# Altium PCB PCB1.PcbDoc
Units mm, origin at the board's own origin, x right, y up, seen from the top; angles counter-clockwise.
Board outline 100 x 50 mm, 4 copper layers (Top Layer, GROUND, POWER, Bottom Layer), stack 0.603 mm thick; 48 components, 31 nets, 156 pads, 137 vias.
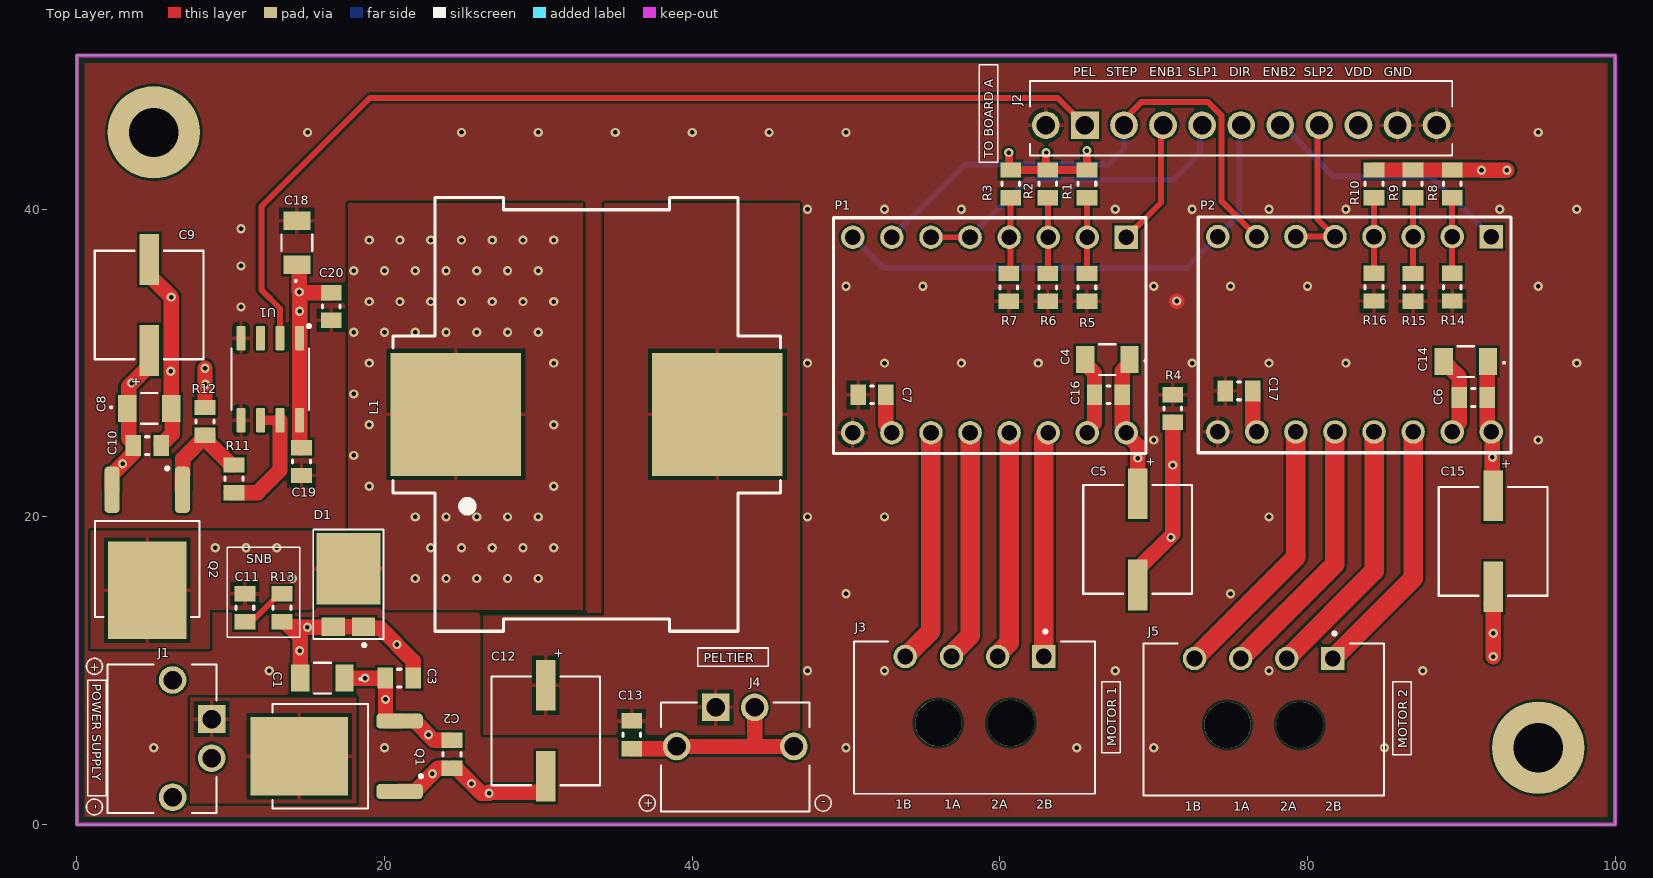
[diagram p0: Top Layer view]
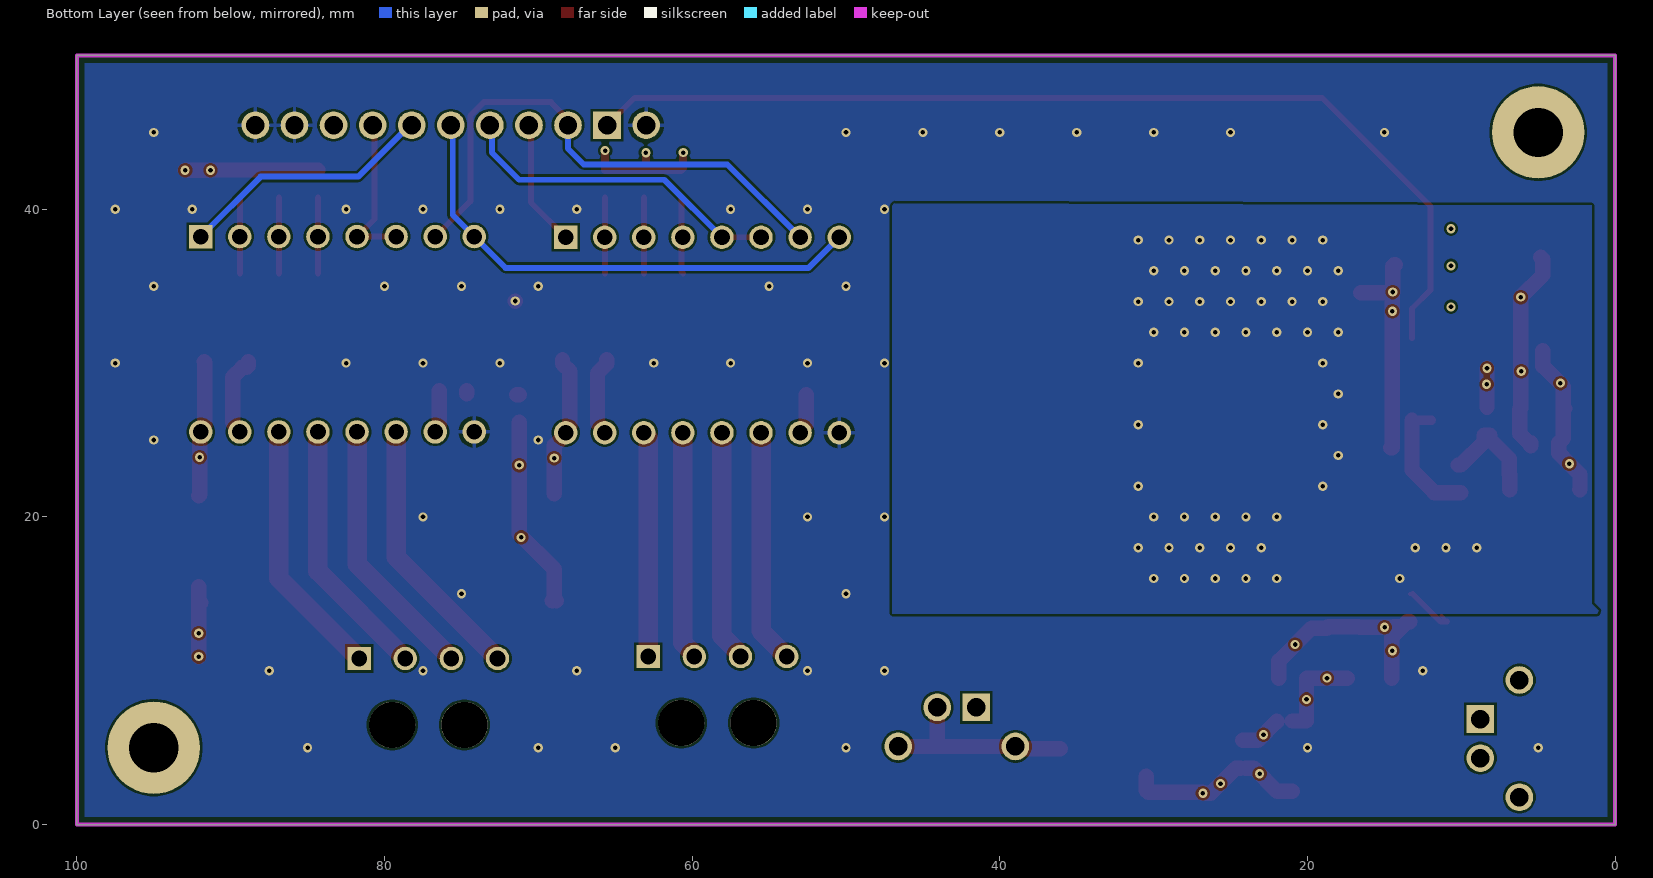
[diagram p1: Bottom Layer view, seen from below]
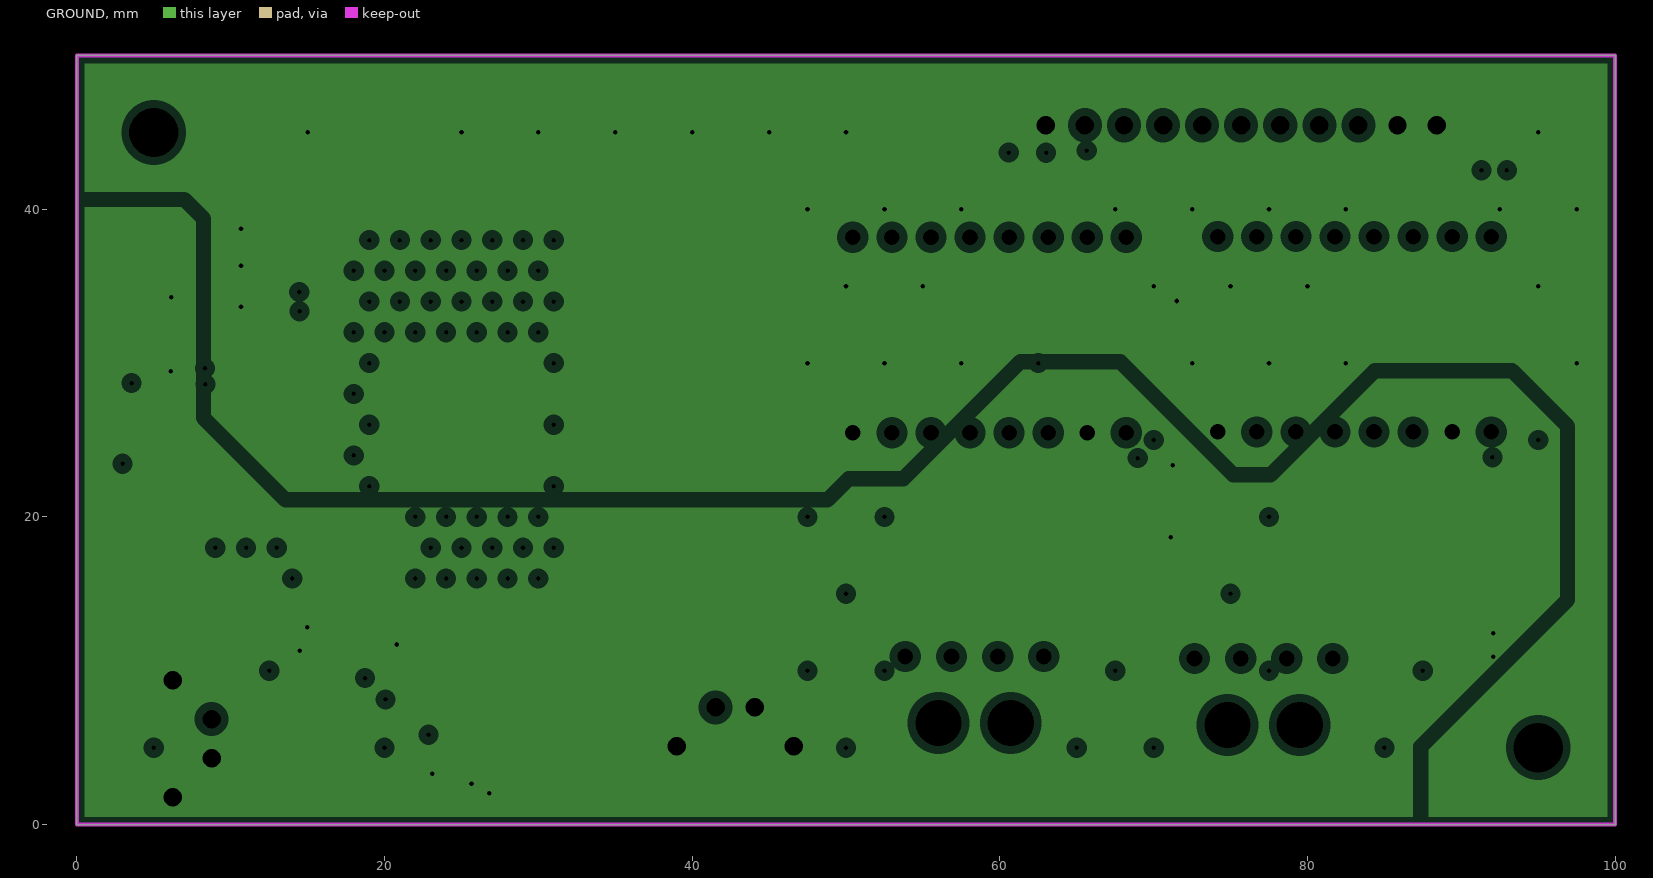
[diagram p2: GROUND, clearances drawn from the general rule]
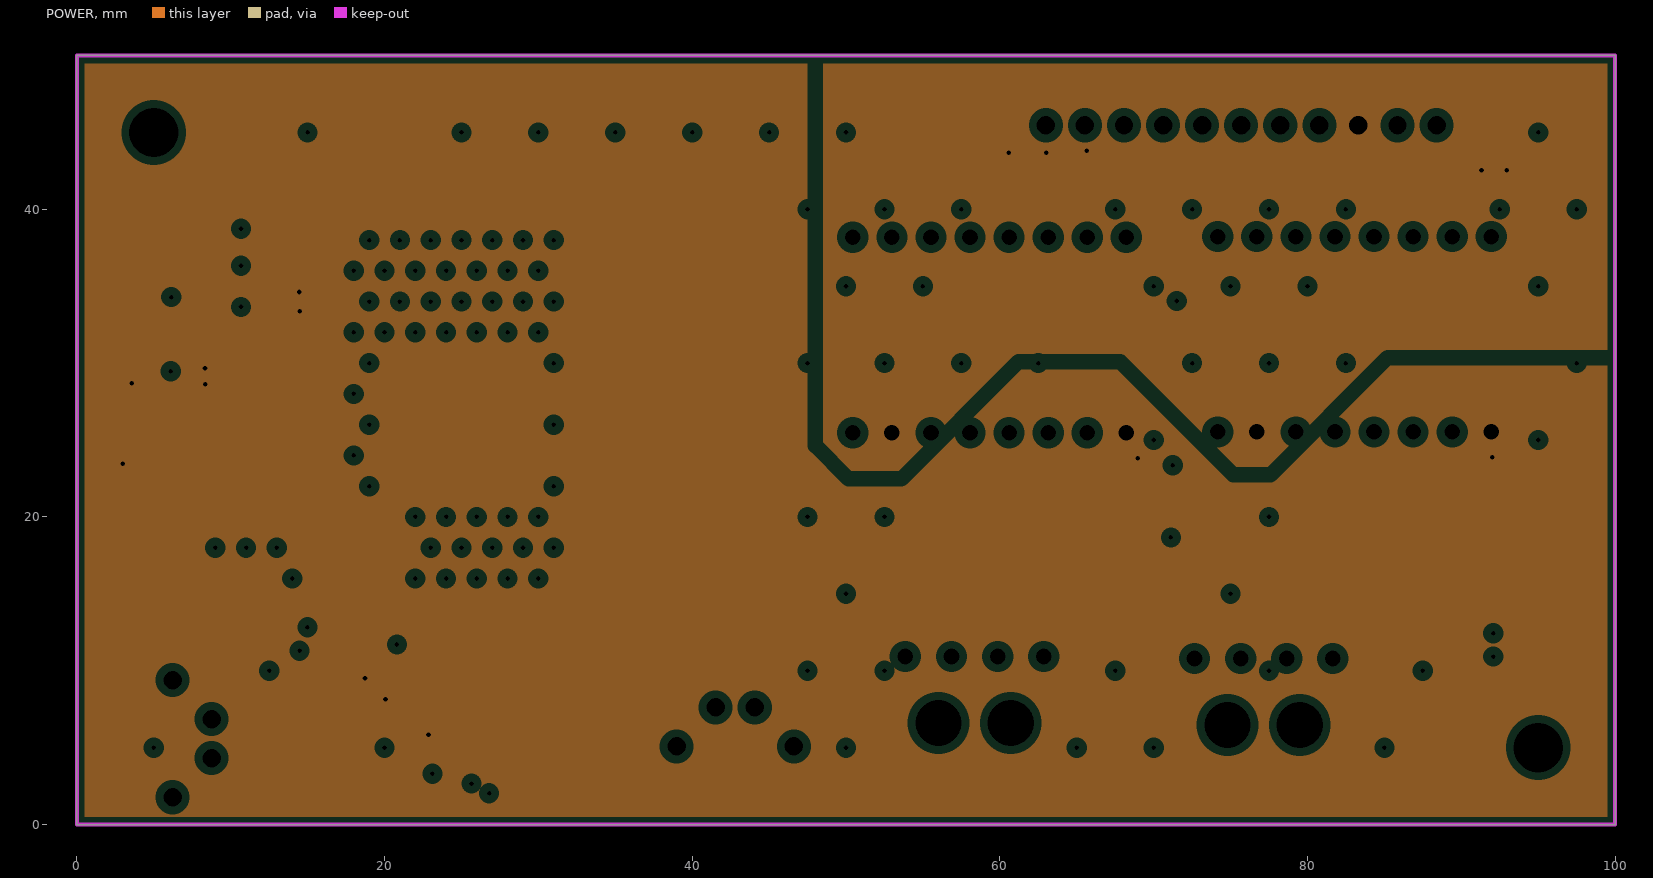
[diagram p3: POWER, clearances drawn from the general rule]

## Layer stack, top to bottom
Top Solder: solder mask 0.0102, Solder Resist, Dk 3.5
Top Layer: signal copper 0.0356
Dielectric 2: prepreg 0.0711, PP-006, Dk 4.1
GROUND: plane copper 0.035, net (Multiple Nets)
Dielectric 1: dielectric 0.32, FR-4, Dk 4.8
POWER: plane copper 0.035, net (Multiple Nets)
Dielectric 3: prepreg 0.0711, PP-006, Dk 4.1
Bottom Layer: signal copper 0.0356
Bottom Solder: solder mask 0.0102, Solder Resist, Dk 3.5

## Board outline
0,0 0,50 100,50 100,0

## Design rules (kind name [scope] priority, off if disabled: settings)
BoardOutlineClearance [All] p1: gap=0.5 ignorepadtopadclearanceinfootprint=FALSE
Clearance Clearance_Jumper [InComponent('SB*')] p1: gap=0.152 ignorepadtopadclearanceinfootprint=TRUE
Clearance Clearanse_Temp_Sensor [InComponent('U4')] p2: gap=0.152 ignorepadtopadclearanceinfootprint=TRUE
Clearance Clearance_bridges [All vs InComponent('SB4_MD1') OR InComponent('SB5_MD1') OR InComponent('SB6_MD1') OR InComponent('SB4_MD2') OR InComponent('SB5_MD2') OR InComponent('SB6_MD2')] p3: gap=0.152 ignorepadtopadclearanceinfootprint=TRUE
Clearance [All] p4: gap=0.152 ignorepadtopadclearanceinfootprint=TRUE
HoleSize [All] p1: absolutevalues=TRUE maxlimit=3.2 minlimit=0.025 maxpercent=80.000 minpercent=20.000
MinimumSolderMaskSliver MinimumSolderMaskSliver_1 [All] p1: minsoldermaskwidth=0.1
MinimumSolderMaskSliver [All] p2: minsoldermaskwidth=0.254
PlaneClearance [All] p1: clearance=0.508
PlaneConnect [All] p1: pad.planeconnectstyle=Relief pad.reliefexpansion=0.508 pad.reliefentries=4 pad.reliefconductorwidth=0.254 pad.reliefairgap=0.254 via.planeconnectstyle=Direct via.reliefexpansion=0.508 via.reliefentries=4 via.reliefconductorwidth=0.254 via.reliefairgap=0.254
PolygonConnect PolygonConnect_1 [InNet('NetD3_3') OR InNet('NetC34_2') OR InNet('NetQ1_1') OR InNet('VBB2') OR InNet('AGND') OR InNet('GND') OR InNet('VCC') OR InNet('VTCD') OR InNet('VDD') OR InNet('NetR5_1') OR InNet('NetC7_2')] p1 off: connectstyle=Direct reliefconductorwidth=0.254 reliefentries=4 polygonreliefangle="90 Angle" airgapwidth=0.254
PolygonConnect [All] p2: thpad.connectstyle=Relief thpad.reliefconductorwidth=0.254 thpad.reliefentries=4 thpad.polygonreliefangle="90 Angle" thpad.airgapwidth=0.254 smdpad.connectstyle=Relief smdpad.reliefconductorwidth=0.254 smdpad.reliefentries=4 smdpad.polygonreliefangle="90 Angle" smdpad.airgapwidth=0.254 via.connectstyle=Direct via.reliefconductorwidth=0.254 via.reliefentries=4 via.polygonreliefangle="90 Angle" via.airgapwidth=0.254
RoutingVias [All] p1: holewidth=0.3 width=0.6 viastyle="Through Hole" minholewidth=0.3 minwidth=0.5 maxholewidth=0.6 maxwidth=1
ShortCircuit ShortCircuit_bridges [All vs InComponent('SB*')] p1: allowed=TRUE
ShortCircuit [All] p2: allowed=FALSE
SilkToSilkClearance SilkToSilkClearance_1 [All] p1: silktosilkclearance=0.1
SilkToSilkClearance [All] p2: silktosilkclearance=0.254
SilkToSolderMaskClearance SilkToSolderMaskClearance_1 [IsPad] p1: minsilkscreentomaskgap=0.1 clearancetoexposedcopper=TRUE
SilkToSolderMaskClearance [IsPad] p2: minsilkscreentomaskgap=0.254 clearancetoexposedcopper=TRUE
SolderMaskExpansion SolderMaskExpansion_1 [All] p1: expansion=0.05 istentingtop=FALSE
SolderMaskExpansion [All] p2: expansion=0.1 istentingtop=FALSE
SupplyNets "Schematic Supply Nets_11" [InNet('VDD2')] p1: voltage=0.000
SupplyNets "Schematic Supply Nets_10" [InNet('GND2')] p2: voltage=0.000
SupplyNets "Schematic Supply Nets_9" [InNet('VBB2')] p3: voltage=0.000
SupplyNets "Schematic Supply Nets_3" [InNet('PGND2')] p4: voltage=0.000
Width Width_Power [InNetClass('Power_Class')] p1: maxlimit=0.6 minlimit=0.3 preferedwidth=0.6
Width Width_bridges [InComponent('SB4_MD1') OR InComponent('SB5_MD1') OR InComponent('SB6_MD1') OR InComponent('SB4_MD2') OR InComponent('SB5_MD2') OR InComponent('SB6_MD2')] p2: maxlimit=0.254 minlimit=0.152 preferedwidth=0.2
Width Width_motores [InNet('VBB')] p3: maxlimit=2 minlimit=0.5 preferedwidth=1
Width [All] p4: maxlimit=1.27 minlimit=0.2 preferedwidth=0.25
23 further rules are at their usual default settings.

## Components (designator, comment, footprint, x,y, rotation, side; value= is the part's Value field where it differs from the comment)
C1 "4.7u" CAP_1206 15.964,9.525 r180 top
C2 "100n" RES_0805 24.384,4.572 r270 top
C3 "100p" RES_0805 20.955,9.525 r0 top
C4 "4.7u" CAP_1206 66.992,30.226 r180 top
C5 "100u" CAP_EEFK_D8_PAN-M 68.961,18.542 r270 top
C6 "100n" RES_0805 90.78,27.762 r180 top
C7 "100n" RES_0805 51.689,27.94 r180 top
C8 "10u" CAP_1206 4.699,27.051 r0 top
C9 "100u" CAP_EEFK_D8_PAN-M 4.699,33.782 r90 top
C10 "100n" RES_0805 4.572,24.638 r0 top
C11 "SNB" RES_0805 10.922,14.097 r270 top
C12 "100u" CAP_EEFK_D8_PAN-M 30.48,6.096 r270 top
C13 "100n" RES_0805 36.068,5.842 r270 top
C14 "4.7u" CAP_1206 90.297,30.099 r180 top
C15 "100u" CAP_EEFK_D8_PAN-M 92.075,18.415 r270 top
C16 "100n" RES_0805 67.056,27.94 r180 top
C17 "100n" RES_0805 75.554,28.194 r180 top
C18 "4.7u" CAP_1206 14.3,37.821 r90 top
C19 "100n" RES_0805 14.605,23.597 r270 top
C20 "100n" RES_0805 16.535,33.68 r270 top
D1 "DIODE_FSV15150V" FSV15150V_TO-277 17.653,15.621 r270 top
J1 "Phoenix2H_1706207" PHOENIX_1706207 1.983,10.418 r270 top
J2 "Phoenix9V_1821465" PHOENIX_1821465 61.972,43.496 r0 top
J3 "Molex_4P" MOLEX_436500402 62.856,10.924 r0 top
J4 "Phoenix2H_1706207" PHOENIX_1706207 37.969,0.84 r0 top
J5 "Molex_4P" MOLEX_436500402 81.653,10.797 r0 top
L1 "74437529203220" WE-HCF_2920_ROUND 33.138,26.67 r90 top
P1 "2x8_PINES" PINES8x2-sep 59.69,31.75 r180 top locked
P2 "2x8_PINES" PINES8x2-sep 83.414,31.797 r180 top locked
Q1 "AOD417" DPAK228P994X240_3N 16.891,4.445 r90 top
Q2 "AOD417" DPAK228P994X240_3N 4.572,17.68 r180 top
R1 "0" RES_0805 65.659,41.656 r90 top
R2 "0" RES_0805 63.119,41.656 r90 top
R3 "0" RES_0805 60.706,41.656 r90 top
R4 "0" RES_0805 71.247,27.051 r270 top
R5 "10k" RES_0805 65.659,34.925 r90 top
R6 "10k" RES_0805 63.119,34.925 r90 top
R7 "10k" RES_0805 60.579,34.925 r90 top
R8 "0" RES_0805 89.408,41.656 r90 top
R9 "0" RES_0805 86.868,41.656 r90 top
R10 "0" RES_0805 84.328,41.656 r90 top
R11 "10" RES_0805 10.211,22.479 r90 top
R12 "100k" RES_0805 8.331,26.213 r270 top
R13 "SNB" RES_0805 13.335,14.097 r90 top
R14 "10k" RES_0805 89.408,34.936 r90 top
R15 "10k" RES_0805 86.868,34.925 r90 top
R16 "10k" RES_0805 84.328,34.936 r90 top
U1 "TC4420COA" SOIC127P599X175-8N 12.573,28.953 r270 top

## Footprints (in the part's own frame and the unit in brackets; to place one, negate y for a bottom-side part, rotate by r counter-clockwise, add the part's x,y. Pads: shape width x height; smd on the part's side, far side on the other; paste and mask are expansions set on the pad)
CAP_1206 [mil]
  rect 47x69 smd paste+0 mask+0: 1(-56.5,0) 2(56.5,0)
  silkscreen extent -100,-40 21,40, body extent -66,-34 66,34, height 71
CAP_EEFK_D8_PAN-M [mil]
  rect 130x50 smd paste+0 mask+0: 1(-116.5,0) 2(116.5,0)
  silkscreen extent -139,-139 139,139, body extent -154,-134 154,134, height 317
DPAK228P994X240_3N [mm]
  rrect50% 0.97x3.02 smd: 1(-2.286,-4.09) 3(2.286,-4.09)
  rect 5.09x6.32 smd paste-4: 4(0,2.44)
  silkscreen extent -3.4,-5.58 3.4,4.18, body extent -3.3,-4.97 3.3,5.06, height 2.41
FSV15150V_TO-277 [mm]
  rect 1.2x1.5 smd: 1(2.75,0.985) 2(2.75,-0.985)
  rect 4.65x4.15 smd: 3(-1,0)
  silkscreen extent -3.56,-2.29 4.05,2.29, body extent -3.25,-2.22 3.25,2.22, height 1.2
MOLEX_436500402 [mm]
  rect 1.52x1.52 / inner round 1.52 / far side rect 1.52x1.52 hole 1.02 mask+0.076: 1(0,0)
  round 1.52 hole 1.02 mask+0.076: 2(-3,0) 3(-6,0) 4(-9,0)
  round 3 hole 3 unplated mask+0.076: ""(-6.85,-4.32) ""(-2.15,-4.32)
  silkscreen extent -12.32,-8.92 3.32,1.72, body extent -12.37,-8.9 3.27,1, height 5.57
PHOENIX_1706207 [mm]
  rect 1.8x1.8 / inner round 1.8 / far side rect 1.8x1.8 hole 1.2: 1(3.56,6.78)
  round 1.8 hole 1.2: 2(6.1,6.78) MH1(1.02,4.24) MH2(8.64,4.24)
  silkscreen extent 0,0 9.66,7.1, body extent 0.04,0 9.71,7.38, height 4.85
PHOENIX_1821465 [mm]
  rect 1.8x1.8 / inner round 1.8 / far side rect 1.8x1.8 hole 1.2: 1(3.56,1.97)
  round 1.8 hole 1.2: 2(6.1,1.97) 3(8.64,1.97) 4(11.18,1.97) 5(13.72,1.97) 6(16.26,1.97) 7(18.8,1.97) 8(21.34,1.97) 9(23.88,1.97) MH1(1.02,1.97) MH2(26.42,1.97)
  silkscreen extent 0,0 27.44,4.85, body extent 0.05,-0.03 27.5,4.82, height 7.1
PINES8x2-sep [mil]
  rect 60x60 / inner round 60 / far side rect 60x60 hole 40: 1(-335.98,-253.15)
  round 60 hole 40: 2(-235.98,-253.15) 3(-135.98,-253.15) 4(-35.98,-253.15) 5(64.02,-253.15) 6(164.02,-253.15) 7(264.02,-253.15) 8(364.02,-253.15) 9(364.02,246.85) 10(264.02,246.85) 11(164.02,246.85) 12(64.02,246.85) 13(-35.98,246.85) 14(-135.98,246.85) 15(-235.98,246.85) 16(-335.98,246.85)
  silkscreen extent -386,-303 414,300, body extent -400,-301 426,300, height 571
RES_0805 [mm] "Chip Resistor, 2-Leads, Body 2.00x1.25mm, IPC Medium Density"
  rect 1x1.35 smd: 1(-0.9,0) 2(0.9,0)
  silkscreen extent -0.1,-0.58 0.1,0.58, body extent -1.05,-0.67 1.05,0.67, height 0.6
SOIC127P599X175-8N [mm]
  rrect25% 1.58x0.6 smd: 1(-2.67,1.905) 2(-2.67,0.635) 3(-2.67,-0.635) 4(-2.67,-1.905) 5(2.67,-1.905) 6(2.67,-0.635) 7(2.67,0.635) 8(2.67,1.905)
  silkscreen extent -3.55,-2.52 1.99,2.6, body extent -3,-2.45 3,2.45, height 1.75
WE-HCF_2920_ROUND [mm]
  rect 8x8.5 smd paste+0 mask+0.102: 1(0,8.5) 2(0,-8.5)
  silkscreen extent -14.1,-12.6 14.1,12.6, body extent -13.62,-11.45 13.68,11.65, height 20

## Part data
C1 C4 C14 C18: library part CAP_1206, "Taiyo Yuden UMK316AB7475KL-T"
C2 C3 C6 C7 C10 C11 C13 C16 C17 C19 C20: library part CAP_0805, "0805 Capacitor without polarity"
C5 C9 C12 C15: library part CAP_RAD_POL, "Panasonic EEE-FK1V101XP"
C8: library part CAP_1206, "Samsung CL31A106KAHNNNE"
J1 J2 J4: Package=None, Availability=Unavailable, Price=None
  J1 J4: MP=1706207
  J2: MF="{'manufacturer': u'Phoenix Contact'}", MP=1821465
J3 J5: "Connector Header Through Hole, Right Angle 4 position 0.118 (3.00mm) (Molex 436500402)", Package=None, Check_prices=https://www.snapeda.com/parts/436500402/Molex/view-part/?ref=eda, MF=Molex, MP=436500402, SnapEDA_Link=https://www.snapeda.com/parts/436500402/Molex/view-part/?ref=snap
L1: library part 22uH_74437529203220, Package=None, Availability=Unavailable, MF="{'manufacturer': u'W\xfcrth Elektronik'}", MP=74437529203220, Price=None
Q1 Q2: "P-Channel 30V 25A _Ta_ 2.5W _Ta_, 50W _Tc_ Surface Mount TO-252, _D-Pak_", Package="TO-252 Alpha &amp; Omega Semiconductor", Availability=Unavailable, MF="Alpha &", MP=AOD417, Price=None, SnapEDA_Link=https://www.snapeda.com/parts/AOD417/Alpha%20%26%20Omega%20Semiconductor%20Inc./view-part/454934/?ref=snap
R1 R2 R3 R4 R5 R6 R7 R8 R9 R10 R11 R12 R13 R14 R15 R16: library part RES_0805, "Generic Capacitor"
U1: "Microchip TC4420COA,MOSFET Power Driver 6A,4.5 to 18V,Non-Inverting,8-Pin SOIC", Package="SOIC-8 Microchip", Check_prices=https://www.snapeda.com/parts/TC4420COA/Microchip/view-part/?ref=eda, MF="Microchip Technology", MP=TC4420COA, SnapEDA_Link=https://www.snapeda.com/parts/TC4420COA/Microchip/view-part/?ref=snap

## Free pads (board coordinates)
  round 6 hole 3.2 unplated mask+0.3: H(5,45) H(95,5)

## Via types
v1: diameter 0.6, hole 0.3, Top Layer to Bottom Layer, 137 vias

## Nets (pads, with @x,y where several pads share a name; then routed paths per layer and width w, separated by ;. In a path a pad name is that pad's centre, name@x,y a point inside that pad or via, vN(x,y) a via of type N, cw(c..) or ccw(c..) an arc to the next point about the centre after c; other vN are vias at no path point)
B_DIR: J2.5 P1.8 P2.8 | length 33.5
  Bottom Layer w0.384: P1.8 52.429,36.195 72.136,36.195 P2.8 75.565,39.624 J2.5@75.565,45.72
B_NENBL1: J2.3 P1.1 | length 8.5
  Top Layer w0.384: P1.1 70.485,40.441 J2.3@70.485,45.72
B_NENBL2: J2.6 P2.1 | length 16.9
  Bottom Layer w0.384: J2.6@78.105,45.72 81.702,42.123 88.052,42.123 P2.1
B_NSLP1: J2.4 P1.5 P1.6 | length 21.8
  Top Layer w0.384: P1.6 P1.5
  Bottom Layer w0.384: P1.5 61.808,41.924 71.261,41.924 73.025,43.688 J2.4@73.025,45.72
B_NSLP2: J2.7 P2.5 P2.6 | length 10.5
  Top Layer w0.384: P2.6 P2.5 80.645,39.37 J2.7@80.645,45.72
B_PELCTRL: J2.1 U1.2 | length 66.3
  Top Layer w0.384: U1.2 13.208,33.553 11.989,34.773 11.989,40.183 19.05,47.244 63.754,47.244 64.824,46.174 J2.1
B_STEP: J2.2 P1.7 P2.7 | length 35.5
  Top Layer w0.384: J2.2@68.326,45.72 67.945,45.72 69.187,46.962 73.539,46.962 74.422,46.079 74.422,40.513 P2.7
  Bottom Layer w0.384: P1.7 57.721,42.917 67.047,42.917 68.072,43.942 J2.2
GND2: C7.2 C17.2 C18.2 C19.2 C20.2 J2.9 J2.MH1 J2.MH2 P1.9 P2.9 R4.1 R5.1 R6.1 R7.1 R14.1 R15.1 R16.1 U1.4 U1.5 | length 0.6
  Top Layer w1: P1.9 P1.9@50.444,25.622 ; R4.1 R4.1@71.422,27.951 ; v1@71.49,34.025 v1(71.501,34.036) ; P2.9 P2.9@74.168,25.669 ; C17.2@74.654,28.019 C17.2
  other v1: 5,5 20,5 50,5 65,5 70,5 85,5 12.5,10 47.5,10 52.5,10 67.5,10 77.5,10 87.5,10 50,15 75,15 47.5,20 52.5,20 77.5,20 70,25 95,25 47.5,30 52.5,30 57.5,30 62.5,30 72.5,30 77.5,30 82.5,30 97.5,30 10.668,33.655 50,35 55,35 70,35 75,35 80,35 95,35 10.668,36.322 10.668,38.735 47.5,40 52.5,40 57.5,40 67.5,40 72.5,40 77.5,40 82.5,40 92.5,40 97.5,40 15,45 25,45 30,45 35,45 40,45 45,45 50,45 95,45
NetC11_1: C11.1 D1.3 L1.1 Q2.4
  other v1: 14,16 22,16 24,16 26,16 28,16 30,16 9,18 11,18 13,18 23,18 25,18 27,18 29,18 31,18 22,20 24,20 26,20 28,20 30,20 19,22 31,22 18,24 19,26 31,26 18,28 19,30 31,30 18,32 20,32 22,32 24,32 26,32 28,32 30,32 19,34 21,34 23,34 25,34 27,34 29,34 31,34 18,36 20,36 22,36 24,36 26,36 28,36 30,36 19,38 21,38 23,38 25,38 27,38 29,38 31,38
NetC11_2: C11.2 R13.2 | length 3.7
  Top Layer w0.25: C11.2 C11.2@11.297,13.572 ; R13.2@13.16,14.997 R13.2
  Top Layer w0.381: C11.2 11.36,13.197 R13.2@13.16,14.997
NetC12_1: C12.1 C13.1 J4.1 L1.2
NetJ1_1: J1.1 Q1.4
NetJ3_1: J3.1 P1.14 | length 14.7
  Top Layer w1.27: J3.1 62.856,25.123 63.144,25.411 P1.14
NetJ3_2: J3.2 P1.13 | length 14.9
  Top Layer w1.27: J3.2 59.856,11.065 60.604,11.813 P1.13
NetJ3_3: J3.3 P1.12 | length 15.1
  Top Layer w1.27: J3.3 56.856,11.065 58.064,12.273 P1.12
NetJ3_4: J3.4 P1.11 | length 15.2
  Top Layer w1.27: J3.4 55.524,12.592 P1.11
NetJ5_1: J5.1 P2.14 | length 16.9
  Top Layer w1.27: J5.1 86.868,16.012 P2.14
NetJ5_2: J5.2 P2.13 | length 17.1
  Top Layer w1.27: J5.2 84.328,16.472 P2.13
NetJ5_3: J5.3 P2.12 | length 17.3
  Top Layer w1.27: J5.3 81.788,16.932 P2.12
NetJ5_4: J5.4 P2.11 | length 17.5
  Top Layer w1.27: J5.4 79.248,17.392 P2.11
NetP1_2: P1.2 R1.1 R5.2 | length 4.9
  Top Layer w0.384: R5.2 R1.1
NetP1_3: P1.3 R2.1 R6.2 | length 4.9
  Top Layer w0.384: R6.2 R2.1
NetP1_4: P1.4 R3.1 R7.2 | length 5
  Top Layer w0.384: R7.2 60.706,35.952 R3.1
NetP2_2: P2.2 R8.1 R14.2 | length 4.9
  Top Layer w0.384: R14.2 P2.2 R8.1
NetP2_3: P2.3 R9.1 R15.2 | length 4.9
  Top Layer w0.384: R15.2 P2.3 R9.1
NetP2_4: P2.4 R10.1 R16.2 | length 4.9
  Top Layer w0.384: R16.2 P2.4 R10.1
NetQ2_1: Q2.1 R11.2 R12.2 | length 7.2
  Top Layer w1: Q2.1 6.858,22.765 6.873,22.78 6.873,23.772 8.156,25.055 8.156,25.313 R12.2 8.506,25.313 8.506,24.909 10.036,23.379 R11.2
NetR11_1: R11.1 U1.6 U1.7 | length 8.3
  Top Layer w0.6: U1.6 U1.7
  Top Layer w1: R11.1@10.036,21.579 11.749,21.579 13.208,23.038 U1.7
PGND2: C1.2 C2.2 C3.2 C4.2 C5.2 C6.2 C8.2 C9.2 C10.2 C12.2 C13.2 C14.2 C15.2 C16.2 D1.1 D1.2 J1.2 J1.MH1 J1.MH2 J4.2 J4.MH1 J4.MH2 P1.15 P2.15 Q1.1 R4.2 R13.1 | length 80.5
  Top Layer w1: C9.2@4.834,36.876 C9.2 4.699,35.725 v1(6.134,34.29) C8.2 6.192,26.993 6.192,25.399 5.606,24.813 5.472,24.813 C10.2 ; R13.1 13.51,13.197 R13.1@13.836,12.871 ; C1.2 14.529,12.178 R13.1@13.836,12.871 ; Q1.1 21.976,2.159 23.489,3.672 C2.2@24.003,3.672 ; C3.2@21.866,9.525 21.866,10.646 19.741,12.771 18.738,12.771 D1.1 D1.2 16.624,12.827 14.433,12.827 14.389,12.871 R13.1@13.836,12.871 ; C2.2 24.649,3.672 26.289,2.032 v1(26.797,2.032) ; v1@26.797,2.093 30.345,2.093 30.48,2.228 C12.2 ; C13.2 38.851,4.942 J4.MH1 44.069,5.08 ; J4.2 44.069,5.08 ; J4.MH2 44.069,5.08 ; C4.2 65.557,29.947 66.156,29.348 C16.2 66.156,26.094 65.684,25.622 P1.15 ; C5.2@68.826,14.539 C5.2@68.961,14.674 ; C5.2@69.096,14.539 C5.2@68.961,14.674 ; R4.2 71.247,18.885 68.961,16.599 C5.2 C5.2@68.961,14.674 ; C14.2 88.862,29.82 88.959,29.723 89.238,29.723 89.88,29.081 89.88,26.14 89.408,25.669 P2.15 ; P2.15@89.308,25.627 P2.15 ; P2.15@89.408,25.385 P2.15 ; C15.2@91.94,14.412 C15.2@92.075,14.547 ; v1(92.075,10.922) C15.2@92.075,14.547 ; C15.2 C15.2@92.075,14.547
  other v1: 25.654,2.667 23.114,3.302 14.478,11.303 20.804,11.709 92.075,12.446 14.986,12.827 71.12,18.669 71.247,23.368 6.096,29.464
VBB2: C1.1 C2.1 C3.1 C4.1 C5.1 C6.1 C8.1 C9.1 C10.1 C14.1 C15.1 C16.1 C18.1 C19.1 C20.1 P1.16 P2.16 Q1.3 Q2.3 R12.1 U1.1 U1.8 | length 55
  Top Layer w1: Q2.3@2.301,21.785 Q2.3 2.286,22.765 v1(2.974,23.452) 3.661,24.14 3.661,24.813 3.361,25.113 3.361,26.954 C8.1 3.361,27.148 3.361,28.469 4.699,29.807 C9.1 ; R12.1 v1(8.331,29.667) ; C18.1@14.326,36.36 C18.1 14.356,36.386 14.453,36.289 v1(14.453,34.62) v1@14.478,34.595 ; C19.1 14.478,24.497 U1.8 U1.1 v1(14.478,33.376) v1@14.478,34.595 ; C20.1 14.492,34.58 v1@14.478,34.595 ; C1.1 v1(18.732,9.525) C3.1 20.066,9.525 v1(20.066,8.136) 20.066,6.746 20.081,6.731 Q1.3 ; Q1.3@21.991,6.716 22.006,6.701 22.006,6.696 23.23,5.472 C2.1@24.209,5.472 ; C4.1 68.428,29.947 67.956,29.475 C16.1 67.956,25.89 68.224,25.622 P1.16 68.224,25.389 68.961,24.652 C5.1 ; C14.1 91.68,30.047 C6.1 91.68,25.937 P2.16@91.848,25.769 ; C15.1 92.011,21.438 92.011,25.463 P2.16 ; P2.16@91.848,25.769 P2.16@91.942,25.675 ; P2.16@91.848,25.769 91.848,25.627 P2.16@91.942,25.533 ; P2.16@91.942,25.533 P2.16 ; P2.16@91.942,25.533 P2.16@91.942,25.675 ; P2.16@91.942,25.675 91.948,25.669 P2.16
  other v1: 22.86,5.842 68.961,23.825 92.024,23.876 8.357,28.626 3.556,28.702
VDD2: C7.1 C17.1 J2.8 P1.10 P2.10 R1.2 R2.2 R3.2 R8.2 R9.2 R10.2 | length 22.6
  Top Layer w0.508: v1(60.579,43.688) 60.597,43.67 60.597,42.665 R3.2 R2.2 ; v1(63.01,43.67) 63.01,42.665 R2.2 ; v1(65.659,43.815) R1.2 R2.2
  Top Layer w1: C7.1 52.589,26.017 52.984,25.622 P1.10 ; C17.1 76.454,25.923 76.708,25.669 P2.10 ; R10.2 R9.2 R8.2 91.313,42.556 91.324,42.545 v1(92.964,42.545)
  other v1: 91.313,42.545
pads on no net: J3. J5. U1.3

## Polygon pours and split planes (outlines as drawn)
GND2 on Top Layer "GND2_L01_P006" (solid, remove dead copper, pour order 6): 0,50.038 100.076,50.038 100.076,0 0,0
NetC12_1 on Top Layer "NETC12_1_L01_P001" (solid, remove dead copper, pour order 1): 26.416,12.954 26.416,12.192 26.416,5.842 43.434,5.842 46.99,5.842 46.99,40.386 34.29,40.386 34.29,40.005 34.29,13.589 26.416,13.589
NetC11_1 on Top Layer "NETC11_1_L01_P000" (solid, remove dead copper, pour order 0): 32.512,40.386 32.893,40.386 32.893,13.97 8.636,13.97 8.636,11.43 0.889,11.43 0.889,19.101 1.346,19.101 17.628,19.101 17.628,40.386 23.368,40.386
NetJ1_1 on Top Layer "NETJ1_1_L01_P002" (solid, remove dead copper, pour order 2): 18.161,8.255 7.366,8.255 7.366,1.397 18.161,1.397
GND2 on Bottom Layer "GND2_L04_P005" (solid, remove dead copper, pour order 5): 0,50.038 100.076,50.038 100.076,0 0,0
NetC11_1 on Bottom Layer "NETC11_1_L04_P004" (solid, remove dead copper, pour order 4): 46.99,40.386 46.99,13.716 0.889,13.716 1.524,14.351 1.524,40.259
VBB2 on POWER (split plane): 47.504,24.638 47.513,24.54 47.542,24.446 47.588,24.359 47.651,24.283 49.81,22.124 49.886,22.061 49.973,22.015 50.067,21.986 50.165,21.977 53.594,21.977 53.692,21.986 53.786,22.015 53.873,22.061 53.949,22.124 61.422,29.597 67.61,29.597 74.829,22.378 74.905,22.315 74.992,22.269 75.086,22.24 75.184,22.231 77.597,22.231 77.695,22.24 77.789,22.269 77.876,22.315 77.952,22.378 85.425,29.851 99.49,29.851 99.49,0.51 0.51,0.51 0.51,49.49 47.504,49.49
VDD2 on POWER (split plane): 99.49,30.855 85.217,30.855 85.119,30.846 85.025,30.817 84.938,30.771 84.862,30.708 77.389,23.235 75.392,23.235 68.173,30.454 68.097,30.517 68.01,30.563 67.916,30.592 67.818,30.601 61.214,30.601 61.116,30.592 61.022,30.563 60.935,30.517 60.859,30.454 53.386,22.981 50.373,22.981 48.508,24.846 48.508,49.49 99.49,49.49
GND2 on GROUND (split plane): 99.49,0.51 87.878,0.51 87.878,4.872 97.256,14.25 97.319,14.326 97.365,14.413 97.394,14.507 97.403,14.605 97.403,25.908 97.394,26.006 97.365,26.1 97.319,26.187 97.256,26.263 93.649,29.87 93.573,29.933 93.486,29.979 93.392,30.008 93.294,30.017 84.379,30.017 84.281,30.008 84.187,29.979 84.1,29.933 84.024,29.87 77.389,23.235 75.392,23.235 68.173,30.454 68.097,30.517 68.01,30.563 67.916,30.592 67.818,30.601 61.341,30.601 61.243,30.592 61.149,30.563 61.062,30.517 60.986,30.454 53.513,22.981 50.165,22.981 50.067,22.972 49.973,22.943 49.886,22.897 49.81,22.834 48.585,21.61 13.772,21.61 8.732,26.65 8.732,39.395 8.722,39.493 8.694,39.588 8.647,39.675 8.585,39.751 7.34,40.995 7.264,41.058 7.177,41.104 7.083,41.133 6.985,41.142 0.51,41.142 0.51,49.49 99.49,49.49
PGND2 on GROUND (split plane): 7.727,39.187 7.727,26.441 7.737,26.343 7.765,26.249 7.812,26.162 7.874,26.086 13.208,20.752 13.284,20.69 13.371,20.643 13.466,20.615 13.564,20.605 48.793,20.605 48.891,20.615 48.986,20.643 49.073,20.69 49.149,20.752 50.373,21.977 53.721,21.977 53.819,21.986 53.913,22.015 54,22.061 54.076,22.124 61.549,29.597 67.61,29.597 74.829,22.378 74.905,22.315 74.992,22.269 75.086,22.24 75.184,22.231 77.597,22.231 77.695,22.24 77.789,22.269 77.876,22.315 77.952,22.378 84.587,29.012 93.086,29.012 96.399,25.7 96.399,14.813 87.021,5.435 86.958,5.359 86.912,5.272 86.883,5.178 86.874,5.08 86.874,0.51 0.51,0.51 0.51,40.138 6.777,40.138

## Keep-outs
Keep-Out Layer:
  the board outline again, w0.254

## Other copper
GROUND (plane layer: these items are gaps in the copper):
  lines w1: 0.127,40.64 6.985,40.64 8.23,39.395 8.23,26.441 13.564,21.107 48.793,21.107 50.165,22.479 53.721,22.479 61.341,30.099 67.818,30.099 75.184,22.733 77.597,22.733 84.379,29.515 93.294,29.515 96.901,25.908 96.901,14.605 87.376,5.08 87.376,0.254
POWER (plane layer: these items are gaps in the copper):
  lines w1: 48.006,50.038 48.006,24.638 50.165,22.479 53.594,22.479 61.214,30.099 67.818,30.099 75.184,22.733 77.597,22.733 85.217,30.353 99.949,30.353

## Silkscreen, mask and mechanical layers (free items; w line width, h text height)
Top Overlay:
  circle w0.1: c48.514,1.397 r0.521
  circle w0.1: c37.084,1.397 r0.521
  circle w0.1: c1.143,10.287 r0.521
  circle w0.1: c1.143,1.143 r0.521
  lines w0.1: 0.711,1.88 0.711,9.398 1.905,9.398 1.905,1.88 0.711,1.88 ; 9.779,12.192 14.478,12.192 14.478,18.034 9.779,18.034 9.779,12.192 ; 40.361,10.287 44.958,10.287 44.958,11.481 40.361,11.481 40.361,10.287 ; 58.674,43.053 58.674,49.403 59.868,49.403 59.868,43.053 58.674,43.053 ; 66.624,4.674 66.624,9.271 67.818,9.271 67.818,4.674 66.624,4.674 ; 85.547,4.547 85.547,9.271 86.741,9.271 86.741,4.547 85.547,4.547
  text "PEL" at 64.77,48.641 h0.6
  text "STEP" at 66.929,48.641 h0.6
  text "ENB1" at 69.723,48.641 h0.6
  text "SLP1" at 72.263,48.641 h0.6
  text "DIR" at 74.93,48.641 h0.6
  text "ENB2" at 77.089,48.641 h0.6
  text "SLP2" at 79.756,48.641 h0.6
  text "VDD" at 82.423,48.641 h0.6
  text "GND" at 84.963,48.641 h0.6
  text "TO BOARD A" at 59.563,43.307 h0.6 r90
  text "SNB" at 11.022,16.991 h0.6
  text "+" at 0.889,10.568 h0.6 r270
  text "PELTIER" at 40.767,10.541 h0.6
  text "POWER SUPPLY" at 0.989,9.171 h0.6 r270
  text "MOTOR 1" at 67.564,5.08 h0.6 r90
  text "MOTOR 2" at 86.487,4.953 h0.6 r90
  text "-" at 48.668,1.724 h0.6 r180
  text "+" at 36.803,1.143 h0.6
  text "1B" at 53.213,1.016 h0.6
  text "1A" at 56.388,1.016 h0.6
  text "2A" at 59.436,1.016 h0.6
  text "2B" at 62.357,1.016 h0.6
  text "-" at 1.47,0.989 h0.6 r90
  text "1B" at 72.009,0.889 h0.6
  text "1A" at 75.184,0.889 h0.6
  text "2A" at 78.232,0.889 h0.6
  text "2B" at 81.153,0.889 h0.6
Mechanical 1:
  the board outline again, w0.254

## Text inside footprints (layer, text, board x,y; h text height)
C5: Top Overlay "+" at 69.536,23.217 h0.6 r270
C9: Top Overlay "+" at 4.124,29.107 h0.6 r90
C12: Top Overlay "+" at 31.055,10.771 h0.6 r270
C15: Top Overlay "+" at 92.65,23.09 h0.6 r270